# EAGLE board ButtonsLEDs (EAGLE 7.4.0)
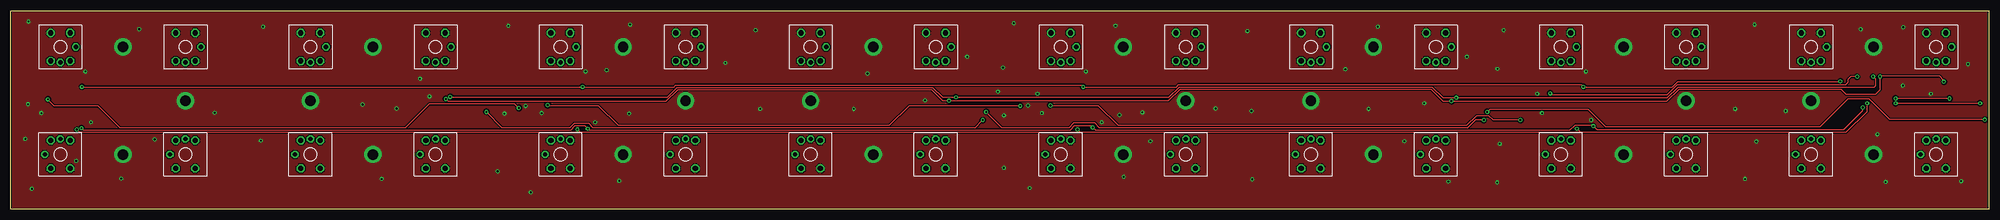
[diagram p0: board, top side]
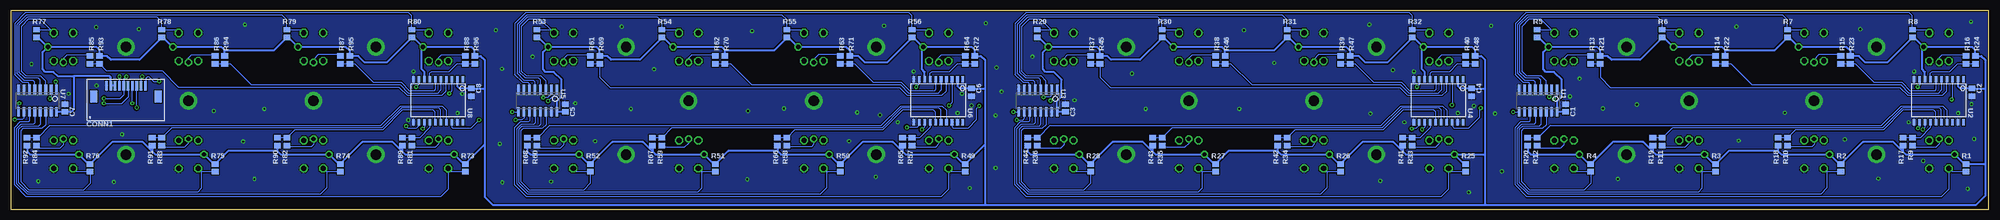
[diagram p1: board, bottom side, seen from below]

Size 458.7 x 46.1 mm. Coordinates in mm from the lower left corner, seen from the top.
Outline: 0,0 0,46.1 458.7,46.1 458.7,0 0,0
Copper layers (1*16): Top 0.035mm / dielectric 1.5mm / Bottom 0.035mm
Design rules "smiery": minimum track width 10mil, minimum drill 12mil, track to track 7mil, track to pad 5mil, pad to pad 5mil, via to via 6mil, smd to smd 0mil, copper to edge 12mil, drill to drill 10mil, minimum pad ring 13mil, minimum via ring 10mil, stop-mask expansion 2mil, vias tented up to drill 25mil, thermal gap 10mil

## Footprints (pad centres in the part's own frame; a part is rotated, then mirrored left to right if it is on the bottom)
C0805 = smd 1.27 x 1.524: 1 -0.9,0; 2 0.9,0
MOLEX-52271-1079 = smd 0.6 x 2.2: 1 -4.5,3.5; 2 -3.5,3.5; 3 -2.5,3.5; 4 -1.5,3.5; 5 -0.5,3.5; 6 0.5,3.5; 7 1.5,3.5; 8 2.5,3.5; 9 3.5,3.5; 10 4.5,3.5 | smd 1.65 x 2.8: S1 -7.5,1; S2 7.5,1
R0805 = smd 1.27 x 1.524: 1 -0.9,0; 2 0.9,0
OMRON-B3W-9 = drill 1.2 octagon: 1 -3.25,2.25; 2 3.25,2.25; 3 -3.25,-2.25; 4 3.25,-2.25 | drill 1 octagon: 6-A 0,3.6; 6-C 3.6,0
SO16 = smd 2.2 x 0.6: 1 -2.6,4.445; 2 -2.6,3.175; 3 -2.6,1.905; 4 -2.6,0.635; 5 -2.6,-0.635; 6 -2.6,-1.905; 7 -2.6,-3.175; 8 -2.6,-4.445; 9 2.6,-4.445; 10 2.6,-3.175; 11 2.6,-1.905; 12 2.6,-0.635; 13 2.6,0.635; 14 2.6,1.905; 15 2.6,3.175; 16 2.6,4.445
SOIC20 = smd 1.5 x 0.6: 1 -5,5.715; 2 -5,4.445; 3 -5,3.175; 4 -5,1.905; 5 -5,0.635; 6 -5,-0.635; 7 -5,-1.905; 8 -5,-3.175; 9 -5,-4.445; 10 -5,-5.715; 11 5,-5.715; 12 5,-4.445; 13 5,-3.175; 14 5,-1.905; 15 5,-0.635; 16 5,0.635; 17 5,1.905; 18 5,3.175; 19 5,4.445; 20 5,5.715

## Placement (x,y rotation side)
C1  100n  [C0805]  98.1,23.5 90 bottom
C2  100n  [C0805]  3.9,27.15 270 bottom
C3  100n  [C0805]  214.1,23.5 90 bottom
C4  100n  [C0805]  119.9,27.15 270 bottom
C5  100n  [C0805]  330.1,23.5 90 bottom
C6  100n  [C0805]  235.9,27.15 270 bottom
C7  100n  [C0805]  446.1,23.5 90 bottom
C8  100n  [C0805]  351.9,27.15 270 bottom
CONN1  PINHD-1X10-FFC-1MM-Z  [MOLEX-52271-1079]  432,25.2 0 bottom
R1  4k7  [R0805]  5.3,9.6 90 bottom
R2  4k7  [R0805]  34.3,9.6 90 bottom
R3  4k7  [R0805]  63.3,9.6 90 bottom
R4  4k7  [R0805]  92.3,9.6 90 bottom
R5  4k7  [R0805]  104.7,40.8 270 bottom
R6  4k7  [R0805]  75.7,40.8 270 bottom
R7  4k7  [R0805]  46.7,40.8 270 bottom
R8  4k7  [R0805]  17.7,40.8 270 bottom
R9  750  [R0805]  17.7,15.7 90 bottom
R10  750  [R0805]  46.7,15.7 90 bottom
R11  750  [R0805]  75.7,15.7 90 bottom
R12  750  [R0805]  104.7,15.7 90 bottom
R13  750  [R0805]  92.3,34.7 270 bottom
R14  750  [R0805]  63.3,34.7 270 bottom
R15  750  [R0805]  34.3,34.7 270 bottom
R16  750  [R0805]  5.3,34.7 270 bottom
R17  4k7  [R0805]  19.9,15.7 270 bottom
R18  4k7  [R0805]  48.9,15.7 270 bottom
R19  4k7  [R0805]  77.9,15.7 270 bottom
R20  4k7  [R0805]  106.9,15.7 270 bottom
R21  4k7  [R0805]  90.1,34.7 90 bottom
R22  4k7  [R0805]  61.1,34.7 90 bottom
R23  4k7  [R0805]  32.1,34.7 90 bottom
R24  4k7  [R0805]  3.1,34.7 90 bottom
R25  4k7  [R0805]  121.3,9.6 90 bottom
R26  4k7  [R0805]  150.3,9.6 90 bottom
R27  4k7  [R0805]  179.3,9.6 90 bottom
R28  4k7  [R0805]  208.3,9.6 90 bottom
R29  4k7  [R0805]  220.7,40.8 270 bottom
R30  4k7  [R0805]  191.7,40.8 270 bottom
R31  4k7  [R0805]  162.7,40.8 270 bottom
R32  4k7  [R0805]  133.7,40.8 270 bottom
R33  750  [R0805]  133.7,15.7 90 bottom
R34  750  [R0805]  162.7,15.7 90 bottom
R35  750  [R0805]  191.7,15.7 90 bottom
R36  750  [R0805]  220.7,15.7 90 bottom
R37  750  [R0805]  208.3,34.7 270 bottom
R38  750  [R0805]  179.3,34.7 270 bottom
R39  750  [R0805]  150.3,34.7 270 bottom
R40  750  [R0805]  121.3,34.7 270 bottom
R41  4k7  [R0805]  135.9,15.7 270 bottom
R42  4k7  [R0805]  164.9,15.7 270 bottom
R43  4k7  [R0805]  193.9,15.7 270 bottom
R44  4k7  [R0805]  222.9,15.7 270 bottom
R45  4k7  [R0805]  206.1,34.7 90 bottom
R46  4k7  [R0805]  177.1,34.7 90 bottom
R47  4k7  [R0805]  148.1,34.7 90 bottom
R48  4k7  [R0805]  119.1,34.7 90 bottom
R49  4k7  [R0805]  237.3,9.6 90 bottom
R50  4k7  [R0805]  266.3,9.6 90 bottom
R51  4k7  [R0805]  295.3,9.6 90 bottom
R52  4k7  [R0805]  324.3,9.6 90 bottom
R53  4k7  [R0805]  336.7,40.8 270 bottom
R54  4k7  [R0805]  307.7,40.8 270 bottom
R55  4k7  [R0805]  278.7,40.8 270 bottom
R56  4k7  [R0805]  249.7,40.8 270 bottom
R57  750  [R0805]  249.7,15.7 90 bottom
R58  750  [R0805]  278.7,15.7 90 bottom
R59  750  [R0805]  307.7,15.7 90 bottom
R60  750  [R0805]  336.7,15.7 90 bottom
R61  750  [R0805]  324.3,34.7 270 bottom
R62  750  [R0805]  295.3,34.7 270 bottom
R63  750  [R0805]  266.3,34.7 270 bottom
R64  750  [R0805]  237.3,34.7 270 bottom
R65  4k7  [R0805]  251.9,15.7 270 bottom
R66  4k7  [R0805]  280.9,15.7 270 bottom
R67  4k7  [R0805]  309.9,15.7 270 bottom
R68  4k7  [R0805]  338.9,15.7 270 bottom
R69  4k7  [R0805]  322.1,34.7 90 bottom
R70  4k7  [R0805]  293.1,34.7 90 bottom
R71  4k7  [R0805]  264.1,34.7 90 bottom
R72  4k7  [R0805]  235.1,34.7 90 bottom
R73  4k7  [R0805]  353.3,9.6 90 bottom
R74  4k7  [R0805]  382.3,9.6 90 bottom
R75  4k7  [R0805]  411.3,9.6 90 bottom
R76  4k7  [R0805]  440.3,9.6 90 bottom
R77  4k7  [R0805]  452.7,40.8 270 bottom
R78  4k7  [R0805]  423.7,40.8 270 bottom
R79  4k7  [R0805]  394.7,40.8 270 bottom
R80  4k7  [R0805]  365.7,40.8 270 bottom
R81  750  [R0805]  365.7,15.7 90 bottom
R82  750  [R0805]  394.7,15.7 90 bottom
R83  750  [R0805]  423.7,15.7 90 bottom
R84  750  [R0805]  452.7,15.7 90 bottom
R85  750  [R0805]  440.3,34.7 270 bottom
R86  750  [R0805]  411.3,34.7 270 bottom
R87  750  [R0805]  382.3,34.7 270 bottom
R88  750  [R0805]  353.3,34.7 270 bottom
R89  4k7  [R0805]  367.9,15.7 270 bottom
R90  4k7  [R0805]  396.9,15.7 270 bottom
R91  4k7  [R0805]  425.9,15.7 270 bottom
R92  4k7  [R0805]  454.9,15.7 270 bottom
R93  4k7  [R0805]  438.1,34.7 90 bottom
R94  4k7  [R0805]  409.1,34.7 90 bottom
R95  4k7  [R0805]  380.1,34.7 90 bottom
R96  4k7  [R0805]  351.1,34.7 90 bottom
SW1  OMRON-B3W-9  [OMRON-B3W-9]  11.5,12.7 90 top
SW2  OMRON-B3W-9  [OMRON-B3W-9]  40.5,12.7 90 top
SW3  OMRON-B3W-9  [OMRON-B3W-9]  69.5,12.7 90 top
SW4  OMRON-B3W-9  [OMRON-B3W-9]  98.5,12.7 90 top
SW5  OMRON-B3W-9  [OMRON-B3W-9]  98.5,37.7 270 top
SW6  OMRON-B3W-9  [OMRON-B3W-9]  69.5,37.7 270 top
SW7  OMRON-B3W-9  [OMRON-B3W-9]  40.5,37.7 270 top
SW8  OMRON-B3W-9  [OMRON-B3W-9]  11.5,37.7 270 top
SW9  OMRON-B3W-9  [OMRON-B3W-9]  127.5,12.7 90 top
SW10  OMRON-B3W-9  [OMRON-B3W-9]  156.5,12.7 90 top
SW11  OMRON-B3W-9  [OMRON-B3W-9]  185.5,12.7 90 top
SW12  OMRON-B3W-9  [OMRON-B3W-9]  214.5,12.7 90 top
SW13  OMRON-B3W-9  [OMRON-B3W-9]  214.5,37.7 270 top
SW14  OMRON-B3W-9  [OMRON-B3W-9]  185.5,37.7 270 top
SW15  OMRON-B3W-9  [OMRON-B3W-9]  156.5,37.7 270 top
SW16  OMRON-B3W-9  [OMRON-B3W-9]  127.5,37.7 270 top
SW17  OMRON-B3W-9  [OMRON-B3W-9]  243.5,12.7 90 top
SW18  OMRON-B3W-9  [OMRON-B3W-9]  272.5,12.7 90 top
SW19  OMRON-B3W-9  [OMRON-B3W-9]  301.5,12.7 90 top
SW20  OMRON-B3W-9  [OMRON-B3W-9]  330.5,12.7 90 top
SW21  OMRON-B3W-9  [OMRON-B3W-9]  330.5,37.7 270 top
SW22  OMRON-B3W-9  [OMRON-B3W-9]  301.5,37.7 270 top
SW23  OMRON-B3W-9  [OMRON-B3W-9]  272.5,37.7 270 top
SW24  OMRON-B3W-9  [OMRON-B3W-9]  243.5,37.7 270 top
SW25  OMRON-B3W-9  [OMRON-B3W-9]  359.5,12.7 90 top
SW26  OMRON-B3W-9  [OMRON-B3W-9]  388.5,12.7 90 top
SW27  OMRON-B3W-9  [OMRON-B3W-9]  417.5,12.7 90 top
SW28  OMRON-B3W-9  [OMRON-B3W-9]  446.5,12.7 90 top
SW29  OMRON-B3W-9  [OMRON-B3W-9]  446.5,37.7 270 top
SW30  OMRON-B3W-9  [OMRON-B3W-9]  417.5,37.7 270 top
SW31  OMRON-B3W-9  [OMRON-B3W-9]  388.5,37.7 270 top
SW32  OMRON-B3W-9  [OMRON-B3W-9]  359.5,37.7 270 top
U1  74HC165  [SO16]  104.5,25.2 270 bottom
U2  TPIC6B595  [SOIC20]  11.6,25.2 270 bottom
U3  74HC165  [SO16]  220.5,25.2 270 bottom
U4  TPIC6B595  [SOIC20]  127.6,25.2 270 bottom
U5  74HC165  [SO16]  336.5,25.2 270 bottom
U6  TPIC6B595  [SOIC20]  243.6,25.2 270 bottom
U7  74HC165  [SO16]  452.5,25.2 270 bottom
U8  TPIC6B595  [SOIC20]  359.6,25.2 270 bottom

## Library data of the parts
C1-C8 R1-R96 SW1-SW32 U2 U4 U6 U8 = igor_lbr
CONN1 = igor_lbr; MANUFACTURER: Molex; MPN: 52271-1079
U1 U3 U5 U7 = igor_lbr; MANUFACTURER: Nexperia; MPN: 74HC165D

## Nets
+3V3: C1.1 C2.1 C3.1 C4.1 C5.1 C6.1 C7.1 C8.1 CONN1.2 CONN1.3 R1.2 R2.2 R3.2 R4.2 R5.2 R6.2 R7.2 R8.2 R17.2 R18.2 R19.2 R20.2 R21.2 R22.2 R23.2 R24.2 R25.2 R26.2 R27.2 R28.2 R29.2 R30.2 R31.2 R32.2 R41.2 R42.2 R43.2 R44.2 R45.2 R46.2 R47.2 R48.2 R49.2 R50.2 R51.2 R52.2 R53.2 R54.2 R55.2 R56.2 R65.2 R66.2 R67.2 R68.2 R69.2 R70.2 R71.2 R72.2 R73.2 R74.2 R75.2 R76.2 R77.2 R78.2 R79.2 R80.2 R89.2 R90.2 R91.2 R92.2 R93.2 R94.2 R95.2 R96.2 SW1.6-A SW2.6-A SW3.6-A SW4.6-A SW5.6-A SW6.6-A SW7.6-A SW8.6-A SW9.6-A SW10.6-A SW11.6-A SW12.6-A SW13.6-A SW14.6-A SW15.6-A SW16.6-A SW17.6-A SW18.6-A SW19.6-A SW20.6-A SW21.6-A SW22.6-A SW23.6-A SW24.6-A SW25.6-A SW26.6-A SW27.6-A SW28.6-A SW29.6-A SW30.6-A SW31.6-A SW32.6-A U1.16 U2.2 U2.8 U3.16 U4.2 U4.8 U5.16 U6.2 U6.8 U7.16 U8.2 U8.8
BUTTON1: R1.1 SW1.1 U1.11
BUTTON2: R2.1 SW2.1 U1.12
BUTTON3: R3.1 SW3.1 U1.13
BUTTON4: R4.1 SW4.1 U1.14
BUTTON5: R5.1 SW5.1 U1.3
BUTTON6: R6.1 SW6.1 U1.4
BUTTON7: R7.1 SW7.1 U1.5
BUTTON8: R8.1 SW8.1 U1.6
BUTTON9: R25.1 SW9.1 U3.11
BUTTON10: R26.1 SW10.1 U3.12
BUTTON11: R27.1 SW11.1 U3.13
BUTTON12: R28.1 SW12.1 U3.14
BUTTON13: R29.1 SW13.1 U3.3
BUTTON14: R30.1 SW14.1 U3.4
BUTTON15: R31.1 SW15.1 U3.5
BUTTON16: R32.1 SW16.1 U3.6
BUTTON17: R49.1 SW17.1 U5.11
BUTTON18: R50.1 SW18.1 U5.12
BUTTON19: R51.1 SW19.1 U5.13
BUTTON20: R52.1 SW20.1 U5.14
BUTTON21: R53.1 SW21.1 U5.3
BUTTON22: R54.1 SW22.1 U5.4
BUTTON23: R55.1 SW23.1 U5.5
BUTTON24: R56.1 SW24.1 U5.6
BUTTON25: R73.1 SW25.1 U7.11
BUTTON26: R74.1 SW26.1 U7.12
BUTTON27: R75.1 SW27.1 U7.13
BUTTON28: R76.1 SW28.1 U7.14
BUTTON29: R77.1 SW29.1 U7.3
BUTTON30: R78.1 SW30.1 U7.4
BUTTON31: R79.1 SW31.1 U7.5
BUTTON32: R80.1 SW32.1 U7.6
GND: C1.2 C2.2 C3.2 C4.2 C5.2 C6.2 C7.2 C8.2 CONN1.1 SW1.3 SW2.3 SW3.3 SW4.3 SW5.3 SW6.3 SW7.3 SW8.3 SW9.3 SW10.3 SW11.3 SW12.3 SW13.3 SW14.3 SW15.3 SW16.3 SW17.3 SW18.3 SW19.3 SW20.3 SW21.3 SW22.3 SW23.3 SW24.3 SW25.3 SW26.3 SW27.3 SW28.3 SW29.3 SW30.3 SW31.3 SW32.3 U1.8 U1.15 U2.10 U2.11 U2.19 U3.8 U3.15 U4.10 U4.11 U4.19 U5.8 U5.15 U6.10 U6.11 U6.19 U7.8 U7.15 U8.10 U8.11 U8.19
LED1: R9.2 R17.1 U2.14
LED1_R: R9.1 SW1.6-C
LED2: R10.2 R18.1 U2.15
LED2_R: R10.1 SW2.6-C
LED3: R11.2 R19.1 U2.16
LED3_R: R11.1 SW3.6-C
LED4: R12.2 R20.1 U2.17
LED4_R: R12.1 SW4.6-C
LED5: R13.2 R21.1 U2.4
LED5_R: R13.1 SW5.6-C
LED6: R14.2 R22.1 U2.5
LED6_R: R14.1 SW6.6-C
LED7: R15.2 R23.1 U2.6
LED7_R: R15.1 SW7.6-C
LED8: R16.2 R24.1 U2.7
LED8_R: R16.1 SW8.6-C
LED9: R33.2 R41.1 U4.14
LED9_R: R33.1 SW9.6-C
LED10: R34.2 R42.1 U4.15
LED10_R: R34.1 SW10.6-C
LED11: R35.2 R43.1 U4.16
LED11_R: R35.1 SW11.6-C
LED12: R36.2 R44.1 U4.17
LED12_R: R36.1 SW12.6-C
LED13: R37.2 R45.1 U4.4
LED13_R: R37.1 SW13.6-C
LED14: R38.2 R46.1 U4.5
LED14_R: R38.1 SW14.6-C
LED15: R39.2 R47.1 U4.6
LED15_R: R39.1 SW15.6-C
LED16: R40.2 R48.1 U4.7
LED16_R: R40.1 SW16.6-C
LED17: R57.2 R65.1 U6.14
LED17_R: R57.1 SW17.6-C
LED18: R58.2 R66.1 U6.15
LED18_R: R58.1 SW18.6-C
LED19: R59.2 R67.1 U6.16
LED19_R: R59.1 SW19.6-C
LED20: R60.2 R68.1 U6.17
LED20_R: R60.1 SW20.6-C
LED21: R61.2 R69.1 U6.4
LED21_R: R61.1 SW21.6-C
LED22: R62.2 R70.1 U6.5
LED22_R: R62.1 SW22.6-C
LED23: R63.2 R71.1 U6.6
LED23_R: R63.1 SW23.6-C
LED24: R64.2 R72.1 U6.7
LED24_R: R64.1 SW24.6-C
LED25: R81.2 R89.1 U8.14
LED25_R: R81.1 SW25.6-C
LED26: R82.2 R90.1 U8.15
LED26_R: R82.1 SW26.6-C
LED27: R83.2 R91.1 U8.16
LED27_R: R83.1 SW27.6-C
LED28: R84.2 R92.1 U8.17
LED28_R: R84.1 SW28.6-C
LED29: R85.2 R93.1 U8.4
LED29_R: R85.1 SW29.6-C
LED30: R86.2 R94.1 U8.5
LED30_R: R86.1 SW30.6-C
LED31: R87.2 R95.1 U8.6
LED31_R: R87.1 SW31.6-C
LED32: R88.2 R96.1 U8.7
LED32_R: R88.1 SW32.6-C
SR_IN_CLOCK: CONN1.5 U1.2 U3.2 U5.2 U7.2
SR_IN_DAISY_OUT_1: U5.9 U7.10
SR_IN_DAISY_OUT_2: U3.9 U5.10
SR_IN_DAISY_OUT_3: U1.9 U3.10
SR_IN_DATA: CONN1.6 U7.9
SR_IN_LATCH: CONN1.4 U1.1 U3.1 U5.1 U7.1
SR_OUT_CLOCK: CONN1.7 U2.13 U4.13 U6.13 U8.13
SR_OUT_DAISY_OUT_1: U6.3 U8.18
SR_OUT_DAISY_OUT_2: U4.3 U6.18
SR_OUT_DAISY_OUT_3: U2.3 U4.18
SR_OUT_DATA: CONN1.9 U8.3
SR_OUT_LATCH: CONN1.8 U2.12 U4.12 U6.12 U8.12
SR_OUT_OE: CONN1.10 U2.9 U4.9 U6.9 U8.9

## Tracks (layer width: path | path; a pad name or v marks a point on that pad's centre or on a via)
+3V3
  Bottom 0.406: R17.2 19.9,13.4 | 19.9,13.4 19.2,12.7 SW1.6-A 5.7,10.5 R1.2 0.8,10.5 | R18.2 48.9,13.5 | 48.9,13.5 48.1,12.7 SW2.6-A 34.7,10.5 R2.2 29.2,15.6 22.1,15.6 19.9,13.4 | R19.2 77.9,13.4 | 77.9,13.4 77.2,12.7 SW3.6-A 63.7,10.5 R3.2 60.3,13.5 48.9,13.5 | R20.2 106.9,13.4 106.2,12.7 SW4.6-A 92.7,10.5 R4.2 87.2,15.6 80.1,15.6 77.9,13.4 | SW8.6-A 3.8,37.7 3.1,37 R24.2 1.7,35.6 0.8,34.7 0.8,28 | R22.2 61.1,37 | 61.1,37 61.8,37.7 SW6.6-A 75.3,39.9 R6.2 75.7,39.6 75.9,39.6 80.8,34.7 87.5,34.7 88.4,35.6 R21.2 90.1,37 90.8,37.7 SW5.6-A | R5.2 104.3,39.9 SW5.6-A | SW8.6-A 17.3,39.9 R8.2 23.5,34.1 28.6,34.1 30.1,35.6 R23.2 32.1,36.8 33,37.7 SW7.6-A 46.3,39.9 R7.2 49.6,37 61.1,37 | 0.8,28 0.8,10.5 | 0.8,10.5 0.8,3.1 3,0.9 116.8,0.9 | C1.1 U1.16 100.06,25.14 99,26.2 99,30.1 100.8,31.9 102.7,31.9 103.3,32.5 103.3,36.5 SW5.6-A | U2.2 7.16,28.66 6.55,28.05 C2.1 0.85,28.05 0.8,28 | U2.8 14.78,31.88 15.4,32.5 15.4,37.4 SW8.6-A | R41.2 135.9,13.4 | 135.9,13.4 135.2,12.7 SW9.6-A | R42.2 164.9,13.5 | 164.9,13.5 164.1,12.7 SW10.6-A 150.7,10.5 R26.2 145.2,15.6 138.1,15.6 135.9,13.4 | R43.2 193.9,13.4 | 193.9,13.4 193.2,12.7 SW11.6-A 179.7,10.5 R27.2 176.3,13.5 164.9,13.5 | R44.2 222.9,13.4 222.2,12.7 SW12.6-A 208.7,10.5 R28.2 203.2,15.6 196.1,15.6 193.9,13.4 | SW16.6-A 119.8,37.7 119.1,37 R48.2 117.7,35.6 116.8,34.7 116.8,28.1 | R46.2 177.1,37 | 177.1,37 177.8,37.7 SW14.6-A 191.3,39.9 R30.2 191.7,39.6 191.9,39.6 196.8,34.7 203.5,34.7 204.4,35.6 R45.2 206.1,37 206.8,37.7 SW13.6-A | R29.2 220.3,39.9 SW13.6-A | SW16.6-A 133.3,39.9 R32.2 139.5,34.1 144.6,34.1 146.1,35.6 R47.2 148.1,36.8 149,37.7 SW15.6-A 162.3,39.9 R31.2 165.6,37 177.1,37
  Bottom 0.406: R25.2 121.7,10.5 SW9.6-A | 116.8,28.1 116.8,12.7 | 116.8,12.7 116.8,0.9 | C3.1 U3.16 216.06,25.14 215,26.2 215,30.1 216.8,31.9 218.7,31.9 219.3,32.5 219.3,36.5 SW13.6-A | U4.2 123.16,28.66 122.55,28.05 C4.1 116.85,28.05 116.8,28.1 | U4.8 130.78,31.88 131.4,32.5 131.4,37.4 SW16.6-A | R65.2 251.9,13.4 | 251.9,13.4 251.2,12.7 SW17.6-A 237.7,10.5 R49.2 232.8,15 | R66.2 280.9,13.5 | 280.9,13.5 280.1,12.7 SW18.6-A 266.7,10.5 R50.2 261.2,15.6 254.1,15.6 251.9,13.4 | R67.2 309.9,13.4 | 309.9,13.4 309.2,12.7 SW19.6-A 295.7,10.5 R51.2 292.3,13.5 280.9,13.5 | R68.2 338.9,13.4 338.2,12.7 SW20.6-A 324.7,10.5 R52.2 319.2,15.6 312.1,15.6 309.9,13.4 | SW24.6-A 235.8,37.7 235.1,37 R72.2 233.7,35.6 232.8,34.7 232.8,28.1 | R70.2 293.1,37 | 293.1,37 293.8,37.7 SW22.6-A 307.3,39.9 R54.2 307.7,39.6 307.9,39.6 312.8,34.7 319.5,34.7 320.4,35.6 R69.2 322.1,37 322.8,37.7 SW21.6-A | R53.2 336.3,39.9 SW21.6-A | SW24.6-A 249.3,39.9 R56.2 255.5,34.1 260.6,34.1 262.1,35.6 R71.2 264.1,36.8 265,37.7 SW23.6-A 278.3,39.9 R55.2 281.6,37 293.1,37 | 232.8,28.1 232.8,15 | C5.1 U5.16 332.06,25.14 331,26.2 331,30.1 332.8,31.9 334.7,31.9 335.3,32.5 335.3,36.5 SW21.6-A | U6.2 239.16,28.66 238.55,28.05 C6.1 232.85,28.05 232.8,28.1 | U6.8 246.78,31.88 247.4,32.5 247.4,37.4 SW24.6-A | R89.2 367.9,13.4 | 367.9,13.4 367.2,12.7 SW25.6-A 353.7,10.5 R73.2 348.8,15 | R90.2 396.9,13.5 | 396.9,13.5 396.1,12.7 SW26.6-A 382.7,10.5 R74.2 377.2,15.6 370.1,15.6 367.9,13.4 | R91.2 425.9,13.4 | 425.9,13.4 425.2,12.7 SW27.6-A 411.7,10.5 R75.2 408.3,13.5 396.9,13.5 | R92.2 454.9,13.4 454.2,12.7 SW28.6-A 440.7,10.5 R76.2 435.2,15.6 428.1,15.6 425.9,13.4
  Bottom 0.406: SW32.6-A 351.8,37.7 351.1,37 R96.2 349.7,35.6 348.8,34.7 348.8,28.1 | R94.2 409.1,37 | 409.1,37 409.8,37.7 SW30.6-A 423.3,39.9 R78.2 423.7,39.6 423.9,39.6 428.8,34.7 435.5,34.7 436.4,35.6 R93.2 438.1,37 438.8,37.7 SW29.6-A | R77.2 452.3,39.9 SW29.6-A | SW32.6-A 365.3,39.9 R80.2 371.5,34.1 376.6,34.1 378.1,35.6 R95.2 380.1,36.8 381,37.7 SW31.6-A 394.3,39.9 R79.2 397.6,37 409.1,37 | 348.8,28.1 348.8,15 | U7.16 C7.1 444.7,22.6 444.1,23.2 444.1,30.9 | SW29.6-A 451.3,36.5 451.3,32.5 450.7,31.9 448.8,31.9 447.8,30.9 444.5,30.9 444.1,30.9 | U8.2 355.15,28.66 354.55,28.05 C8.1 348.85,28.05 348.8,28.1 | U8.8 362.77,31.88 363.4,32.5 363.4,37.4 SW32.6-A | 116.8,0.9 232.8,0.9 | 232.8,0.9 346.8,0.9 348.8,2.9 348.8,15 | 232.8,15 232.8,0.9 | SW9.6-A 116.8,12.7 | CONN1.3 CONN1.2 435.5,30.6 435.8,30.9 444.1,30.9
BUTTON1
  Bottom 0.254: R1.1 8.5,8.7 SW1.1 9.25,4.65 11,2.9 107.1,2.9 109.8,5.6 109.8,19 108.6,20.2 106.7,20.2 106.41,20.5 U1.11
BUTTON2
  Bottom 0.254: R2.1 37.5,8.7 | 37.5,8.7 SW2.1 | 37.5,8.7 37.5,4.9 39,3.4 106.8,3.4 109.3,5.9 109.3,18.8 108.4,19.7 105.5,19.7 105.14,20.07 U1.12
BUTTON3
  Bottom 0.254: R3.1 66.5,8.7 | 66.5,8.7 SW3.1 | 66.5,8.7 66.5,4.8 67.4,3.9 106.6,3.9 108.8,6.1 108.8,18.6 108.2,19.2 104.3,19.2 103.86,19.64 U1.13
BUTTON4
  Bottom 0.254: SW4.1 95.5,8.7 R4.1 92.3,6 93.9,4.4 106.4,4.4 108.3,6.3 108.3,18.3 107.9,18.7 103.5,18.7 102.59,19.61 U1.14
BUTTON5
  Bottom 0.254: R5.1 101.5,41.7 SW5.1 103.9,44.1 106.6,44.1 108.3,42.4 108.3,32.1 107.1,30.9 103.7,30.9 102.59,29.8 U1.3
BUTTON6
  Bottom 0.254: SW6.1 72.5,41.7 R6.1 75.7,43.6 76.7,44.6 106.9,44.6 108.8,42.7 108.8,31.9 107.3,30.4 104.3,30.4 103.86,29.96 U1.4
BUTTON7
  Bottom 0.254: SW7.1 43.5,41.7 R7.1 46.7,44 47.8,45.1 107.1,45.1 109.3,42.9 109.3,31.6 107.6,29.9 105.5,29.9 105.14,29.54 U1.5
BUTTON8
  Bottom 0.254: SW8.1 14.5,41.7 R8.1 17.7,44.9 18.4,45.6 107.3,45.6 109.8,43.1 109.8,31.3 107.9,29.4 106.7,29.4 106.41,29.11 U1.6
BUTTON9
  Bottom 0.254: R25.1 124.5,8.7 SW9.1 125.25,4.65 127,2.9 223.1,2.9 225.8,5.6 225.8,19 224.6,20.2 222.7,20.2 222.41,20.5 U3.11
BUTTON10
  Bottom 0.254: R26.1 153.5,8.7 | 153.5,8.7 SW10.1 | 153.5,8.7 153.5,4.9 155,3.4 222.8,3.4 225.3,5.9 225.3,18.8 224.4,19.7 221.5,19.7 221.13,20.07 U3.12
BUTTON11
  Bottom 0.254: R27.1 182.5,8.7 | 182.5,8.7 SW11.1 | 182.5,8.7 182.5,4.8 183.4,3.9 222.6,3.9 224.8,6.1 224.8,18.6 224.2,19.2 220.3,19.2 219.87,19.64 U3.13
BUTTON12
  Bottom 0.254: SW12.1 211.5,8.7 R28.1 208.3,6 209.9,4.4 222.4,4.4 224.3,6.3 224.3,18.3 223.9,18.7 219.5,18.7 218.59,19.61 U3.14
BUTTON13
  Bottom 0.254: R29.1 217.5,41.7 SW13.1 219.9,44.1 222.6,44.1 224.3,42.4 224.3,32.1 223.1,30.9 219.7,30.9 218.59,29.8 U3.3
BUTTON14
  Bottom 0.254: SW14.1 188.5,41.7 R30.1 191.7,43.6 192.7,44.6 222.9,44.6 224.8,42.7 224.8,31.9 223.3,30.4 220.3,30.4 219.87,29.96 U3.4
BUTTON15
  Bottom 0.254: SW15.1 159.5,41.7 R31.1 162.7,44 163.8,45.1 223.1,45.1 225.3,42.9 225.3,31.6 223.6,29.9 221.5,29.9 221.13,29.54 U3.5
BUTTON16
  Bottom 0.254: SW16.1 130.5,41.7 R32.1 133.7,44.9 134.4,45.6 223.3,45.6 225.8,43.1 225.8,31.3 223.9,29.4 222.7,29.4 222.41,29.11 U3.6
BUTTON17
  Bottom 0.254: R49.1 240.5,8.7 SW17.1 241.25,4.65 243,2.9 339.1,2.9 341.8,5.6 341.8,19 340.6,20.2 338.7,20.2 338.4,20.5 U5.11
BUTTON18
  Bottom 0.254: R50.1 269.5,8.7 | 269.5,8.7 SW18.1 | 269.5,8.7 269.5,4.9 271,3.4 338.8,3.4 341.3,5.9 341.3,18.8 340.4,19.7 337.5,19.7 337.13,20.07 U5.12
BUTTON19
  Bottom 0.254: R51.1 298.5,8.7 | 298.5,8.7 SW19.1 | 298.5,8.7 298.5,4.8 299.4,3.9 338.6,3.9 340.8,6.1 340.8,18.6 340.2,19.2 336.3,19.2 335.87,19.64 U5.13
BUTTON20
  Bottom 0.254: SW20.1 327.5,8.7 R52.1 324.3,6 325.9,4.4 338.4,4.4 340.3,6.3 340.3,18.3 339.9,18.7 335.5,18.7 334.6,19.61 U5.14
BUTTON21
  Bottom 0.254: R53.1 333.5,41.7 SW21.1 335.9,44.1 338.6,44.1 340.3,42.4 340.3,32.1 339.1,30.9 335.7,30.9 334.6,29.8 U5.3
BUTTON22
  Bottom 0.254: SW22.1 304.5,41.7 R54.1 307.7,43.6 308.7,44.6 338.9,44.6 340.8,42.7 340.8,31.9 339.3,30.4 336.3,30.4 335.87,29.96 U5.4
BUTTON23
  Bottom 0.254: SW23.1 275.5,41.7 R55.1 278.7,44 279.8,45.1 339.1,45.1 341.3,42.9 341.3,31.6 339.6,29.9 337.5,29.9 337.13,29.54 U5.5
BUTTON24
  Bottom 0.254: SW24.1 246.5,41.7 R56.1 249.7,44.9 250.4,45.6 339.3,45.6 341.8,43.1 341.8,31.3 339.9,29.4 338.7,29.4 338.4,29.11 U5.6
BUTTON25
  Bottom 0.254: R73.1 356.5,8.7 SW25.1 357.25,4.65 359,2.9 455.1,2.9 457.8,5.6 457.8,19 456.6,20.2 454.7,20.2 454.4,20.5 U7.11
BUTTON26
  Bottom 0.254: R74.1 385.5,8.7 | 385.5,8.7 SW26.1 | 385.5,8.7 385.5,4.9 387,3.4 454.8,3.4 457.3,5.9 457.3,18.8 456.4,19.7 453.5,19.7 453.13,20.07 U7.12
BUTTON27
  Bottom 0.254: R75.1 414.5,8.7 | 414.5,8.7 SW27.1 | 414.5,8.7 414.5,4.8 415.4,3.9 454.6,3.9 456.8,6.1 456.8,18.6 456.2,19.2 452.3,19.2 451.87,19.64 U7.13
BUTTON28
  Bottom 0.254: SW28.1 443.5,8.7 R76.1 440.3,6 441.9,4.4 454.4,4.4 456.3,6.3 456.3,18.3 455.9,18.7 451.5,18.7 450.6,19.61 U7.14
BUTTON29
  Bottom 0.254: R77.1 449.5,41.7 SW29.1 451.9,44.1 454.6,44.1 456.3,42.4 456.3,32.1 455.1,30.9 451.7,30.9 450.6,29.8 U7.3
BUTTON30
  Bottom 0.254: SW30.1 420.5,41.7 R78.1 423.7,43.6 424.7,44.6 454.9,44.6 456.8,42.7 456.8,31.9 455.3,30.4 452.3,30.4 451.87,29.96 U7.4
BUTTON31
  Bottom 0.254: SW31.1 391.5,41.7 R79.1 394.7,44 395.8,45.1 455.1,45.1 457.3,42.9 457.3,31.6 455.6,29.9 453.5,29.9 453.13,29.54 U7.5
BUTTON32
  Bottom 0.254: SW32.1 362.5,41.7 R80.1 365.7,44.9 366.4,45.6 455.3,45.6 457.8,43.1 457.8,31.3 455.9,29.4 454.7,29.4 454.4,29.11 U7.6
GND  (via drill 0.4 pad 0.6, 2.4 pad 4)
  other vias: 17.3,32 18.6,20.2 7.1,22.3 26,37.7 40.5,25.2 69.5,25.2 84,37.7 84,12.7 26,12.7 365.3,32 366.5,20.7 355.1,22.3 374,37.7 388.5,25.2 417.5,25.2 432,37.7 432,12.7 374,12.7 249.3,32 253,20.2 239.1,22.3 258,37.7 272.5,25.2 301.5,25.2 316,37.7 316,12.7 258,12.7 133.3,32 135.5,20.2 123.1,22.3 142,37.7 156.5,25.2 185.5,25.2 200,37.7 200,12.7 142,12.7 257.1,21.9 264.3,15.8 258.1,7.5 236.3,4.9 230.3,9.6 230.1,32.9 256.2,42.6 232.6,43.2 143.4,22.2 115.4,42.6 81.6,24.3 58.5,42.4 29.8,41.8 25.6,7.1 47.3,22.4 173.8,23.3 141.1,6.6 120.6,3.9 112.9,8.8 228.9,27.3 230.3,21.8 262.4,22.5 287.7,22.8 314.9,23.3 309.5,32.5 286.8,41.4 317,42.4 337.7,35.4 346.2,41.6 344.8,32.6 345.3,15.2 344.7,6.2 333.4,6.4 323.2,15.8 287.9,6.9 279.4,23.4 399.9,23.3 411.6,22.8 402.2,7 404.8,15.7 432.9,17.4 434.8,6.3 452.3,6.5 453.9,33.7 438.9,42.3 429,41.8 404.4,42.9 4.1,43.6 3.4,16.3 4.9,4.7 15.2,11.2 33.4,16.2 58,15.9 86,7 89.5,23.4 94.9,30.3 114.5,22.2 138.2,32.3 143.6,42.9 172.7,41.6 165.7,34 198.7,31.5 195.5,23.3 221.8,35.4 235.9,24.1 212,25.3 119.4,24 97.1,26.2 4,24.4 238.1,26.8 327.8,24.6 354,26.8 438.8,28.7 445.3,26.8
  pour Bottom (isolate 0.305): 0,0 458.7,0 458.7,46.1 0,46.1
  pour Top (isolate 0.305): 0,46.1 458.7,46.1 458.7,0 0,0
LED1
  Bottom 0.254: R17.1 R9.2 15.9,16.6 13.51,19 U2.14
LED1_R
  Bottom 0.254: SW1.6-C 11.5,15.2 12.3,14.4 17.3,14.4 R9.1
LED2
  Bottom 0.254: R18.1 R10.2 44.9,18.4 24.5,18.4 19.9,23 12.7,23 12.23,22.54 U2.15
LED2_R
  Bottom 0.254: SW2.6-C 40.5,15 41,14.5 46.4,14.5 R10.1
LED3
  Bottom 0.254: R19.1 R11.2 73.4,18.9 24.7,18.9 20.1,23.5 11.4,23.5 10.96,23.07 U2.16
LED3_R
  Bottom 0.254: SW3.6-C 69.5,15.3 70.5,14.3 75.2,14.3 R11.1
LED4
  Bottom 0.254: R20.1 R12.2 104.5,16.6 101.7,19.4 24.9,19.4 20.3,24 10.7,24 9.7,23 U2.17
LED4_R
  Bottom 0.254: SW4.6-C 98.5,14.9 99.3,14.1 104,14.1 R12.1
LED5
  Bottom 0.254: R13.2 R21.1 90.1,30.7 87.7,28.3 20.6,28.3 18.8,26.5 10.7,26.5 9.7,27.5 U2.4
LED5_R
  Bottom 0.254: SW5.6-C 98.5,35 97.6,35.9 92.6,35.9 R13.1
LED6
  Bottom 0.254: R22.1 R14.2 59.8,33.8 54.9,28.9 20.4,28.9 18.5,27 11.6,27 10.96,27.64 U2.5
LED6_R
  Bottom 0.254: SW6.6-C 69.5,35.1 68.7,35.9 63.6,35.9 R14.1
LED7
  Bottom 0.254: R23.1 R15.2 31,33.8 26.7,29.5 20.2,29.5 18.2,27.5 12.5,27.5 12.23,27.77 U2.6
LED7_R
  Bottom 0.254: SW7.6-C 40.5,34.8 39.3,36 34.7,36 R15.1
LED8
  Bottom 0.254: R24.1 R16.2 7.2,33.8 9,32 13.1,32 13.51,31.59 U2.7
LED8_R
  Bottom 0.254: SW8.6-C 11.5,35.2 10.8,35.9 5.6,35.9 R16.1
LED9
  Bottom 0.254: R41.1 R33.2 131.9,16.6 129.5,19 U4.14
LED9_R
  Bottom 0.254: SW9.6-C 127.5,15.2 128.3,14.4 133.3,14.4 R33.1
LED10
  Bottom 0.254: R42.1 R34.2 160.9,18.4 140.5,18.4 135.9,23 128.7,23 128.24,22.54 U4.15
LED10_R
  Bottom 0.254: SW10.6-C 156.5,15 157,14.5 162.4,14.5 R34.1
LED11
  Bottom 0.254: R43.1 R35.2 189.4,18.9 140.7,18.9 136.1,23.5 127.4,23.5 126.97,23.07 U4.16
LED11_R
  Bottom 0.254: SW11.6-C 185.5,15.3 186.5,14.3 191.2,14.3 R35.1
LED12
  Bottom 0.254: R44.1 R36.2 220.5,16.6 217.7,19.4 140.9,19.4 136.3,24 126.7,24 125.7,23 U4.17
LED12_R
  Bottom 0.254: SW12.6-C 214.5,14.9 215.3,14.1 220,14.1 R36.1
LED13
  Bottom 0.254: R37.2 R45.1 206.1,30.7 203.7,28.3 136.6,28.3 134.8,26.5 126.7,26.5 125.7,27.5 U4.4
LED13_R
  Bottom 0.254: SW13.6-C 214.5,35 213.6,35.9 208.6,35.9 R37.1
LED14
  Bottom 0.254: R46.1 R38.2 175.8,33.8 170.9,28.9 136.4,28.9 134.5,27 127.6,27 126.97,27.64 U4.5
LED14_R
  Bottom 0.254: SW14.6-C 185.5,35.1 184.7,35.9 179.6,35.9 R38.1
LED15
  Bottom 0.254: R47.1 R39.2 147,33.8 142.7,29.5 136.2,29.5 134.2,27.5 128.5,27.5 128.24,27.77 U4.6
LED15_R
  Bottom 0.254: SW15.6-C 156.5,34.8 155.3,36 150.7,36 R39.1
LED16
  Bottom 0.254: R48.1 R40.2 123.2,33.8 125,32 129.1,32 129.5,31.59 U4.7
LED16_R
  Bottom 0.254: SW16.6-C 127.5,35.2 126.8,35.9 121.6,35.9 R40.1
LED17
  Bottom 0.254: R65.1 R57.2 247.9,16.6 245.5,19 U6.14
LED17_R
  Bottom 0.254: SW17.6-C 243.5,15.2 244.3,14.4 249.3,14.4 R57.1
LED18
  Bottom 0.254: R66.1 R58.2 276.9,18.4 256.5,18.4 251.9,23 244.7,23 244.24,22.54 U6.15
LED18_R
  Bottom 0.254: SW18.6-C 272.5,15 273,14.5 278.4,14.5 R58.1
LED19
  Bottom 0.254: R67.1 R59.2 305.4,18.9 256.7,18.9 252.1,23.5 243.4,23.5 242.97,23.07 U6.16
LED19_R
  Bottom 0.254: SW19.6-C 301.5,15.3 302.5,14.3 307.2,14.3 R59.1
LED20
  Bottom 0.254: R68.1 R60.2 336.5,16.6 333.7,19.4 256.9,19.4 252.3,24 242.7,24 241.7,23 U6.17
LED20_R
  Bottom 0.254: SW20.6-C 330.5,14.9 331.3,14.1 336,14.1 R60.1
LED21
  Bottom 0.254: R61.2 R69.1 322.1,30.7 319.7,28.3 252.6,28.3 250.8,26.5 242.7,26.5 241.7,27.5 U6.4
LED21_R
  Bottom 0.254: SW21.6-C 330.5,35 329.6,35.9 324.6,35.9 R61.1
LED22
  Bottom 0.254: R70.1 R62.2 291.8,33.8 286.9,28.9 252.4,28.9 250.5,27 243.6,27 242.97,27.64 U6.5
LED22_R
  Bottom 0.254: SW22.6-C 301.5,35.1 300.7,35.9 295.6,35.9 R62.1
LED23
  Bottom 0.254: R71.1 R63.2 263,33.8 258.7,29.5 252.2,29.5 250.2,27.5 244.5,27.5 244.24,27.77 U6.6
LED23_R
  Bottom 0.254: SW23.6-C 272.5,34.8 271.3,36 266.7,36 R63.1
LED24
  Bottom 0.254: R72.1 R64.2 239.2,33.8 241,32 245.1,32 245.5,31.59 U6.7
LED24_R
  Bottom 0.254: SW24.6-C 243.5,35.2 242.8,35.9 237.6,35.9 R64.1
LED25
  Bottom 0.254: R89.1 R81.2 363.9,16.6 361.5,19 U8.14
LED25_R
  Bottom 0.254: SW25.6-C 359.5,15.2 360.3,14.4 365.3,14.4 R81.1
LED26
  Bottom 0.254: R90.1 R82.2 392.9,18.4 372.5,18.4 367.9,23 360.7,23 360.24,22.54 U8.15
LED26_R
  Bottom 0.254: SW26.6-C 388.5,15 389,14.5 394.4,14.5 R82.1
LED27
  Bottom 0.254: R91.1 R83.2 421.4,18.9 372.7,18.9 368.1,23.5 359.4,23.5 358.96,23.07 U8.16
LED27_R
  Bottom 0.254: SW27.6-C 417.5,15.3 418.5,14.3 423.2,14.3 R83.1
LED28
  Bottom 0.254: R92.1 R84.2 452.5,16.6 449.7,19.4 372.9,19.4 368.3,24 358.7,24 357.7,23 U8.17
LED28_R
  Bottom 0.254: SW28.6-C 446.5,14.9 447.3,14.1 452,14.1 R84.1
LED29
  Bottom 0.254: R85.2 R93.1 436.4,32.1 423.5,32.1 419.7,28.3 368.6,28.3 366.8,26.5 358.7,26.5 357.7,27.5 U8.4
LED29_R
  Bottom 0.254: SW29.6-C 446.5,35 445.6,35.9 440.6,35.9 R85.1
LED30
  Bottom 0.254: R94.1 R86.2 407.8,33.8 402.9,28.9 368.4,28.9 366.5,27 359.6,27 358.96,27.64 U8.5
LED30_R
  Bottom 0.254: SW30.6-C 417.5,35.1 416.7,35.9 411.6,35.9 R86.1
LED31
  Bottom 0.254: R95.1 R87.2 379,33.8 374.7,29.5 368.2,29.5 366.2,27.5 360.5,27.5 360.24,27.77 U8.6
LED31_R
  Bottom 0.254: SW31.6-C 388.5,34.8 387.3,36 382.7,36 R87.1
LED32
  Bottom 0.254: R96.1 R88.2 355.2,33.8 357,32 361.1,32 361.5,31.59 U8.7
LED32_R
  Bottom 0.254: SW32.6-C 359.5,35.2 358.8,35.9 353.6,35.9 R88.1
SR_IN_CLOCK  (via drill 0.4 pad 0.6)
  Top 0.254: v101.9,26.1 152.3,26.1 154.5,28.3 213.8,28.3 216.1,26 v219.2,26 268.6,26 271,28.4 329.6,28.4 332.1,25.9 v335.2,25.9 384.2,25.9 386.7,28.4 432.2,28.4 CONN1.5 432.5,30.2 v431.9,30.8 | v449.6,25.7 v437.1,25.7
  Bottom 0.254: U1.2 101.33,26.68 v101.9,26.1 | v437.1,25.7 433.3,25.7 432.5,26.5 CONN1.5 432.5,30.2 v431.9,30.8 | U3.2 217.32,26.38 217.7,26 v219.2,26 | U5.2 333.32,26.77 334.2,25.9 v335.2,25.9 | U7.2 449.32,25.98 v449.6,25.7
SR_IN_DAISY_OUT_1  (via drill 0.4 pad 0.6)
  Top 0.254: v457.8,20.8 435.8,20.8 431,25.6 426,25.6 419.5,19.1 369.9,19.1 365.8,23.2 343,23.2 v342.4,22.6
  Bottom 0.254: U7.10 455.68,21.12 456,20.8 v457.8,20.8 | v342.4,22.6 U5.9
SR_IN_DAISY_OUT_2  (via drill 0.4 pad 0.6)
  Top 0.254: v226.2,22.6 229.9,18.9 245.4,18.9 246.5,20 251.4,20 252.5,18.9 337.85,18.9 339.65,20.7 v341.6,20.7
  Bottom 0.254: v226.2,22.6 U3.9 | U5.10 339.68,21.23 340.2,20.7 v341.6,20.7
SR_IN_DAISY_OUT_3  (via drill 0.4 pad 0.6)
  Top 0.254: v110.3,22.6 114,18.9 129.6,18.9 130.6,19.9 134.1,19.9 135.1,18.9 223.6,18.9 v225.4,20.7
  Bottom 0.254: v110.3,22.6 U1.9 | v225.4,20.7 224,20.7 223.68,21.02 U3.10
SR_IN_DATA  (via drill 0.4 pad 0.6)
  Top 0.254: v456.7,24.6 v437.1,24.6
  Bottom 0.254: U7.9 456.94,24.36 v456.7,24.6 | v437.1,24.6 433,24.6 431.5,26.1 CONN1.6
SR_IN_LATCH  (via drill 0.4 pad 0.6)
  Top 0.254: v100.9,25.6 101.4,25.1 152,25.1 154.7,27.8 213.5,27.8 216.1,25.2 v217.6,25.2 268.5,25.2 271.2,27.9 329.3,27.9 332.1,25.1 v334.1,25.1 384.1,25.1 386.9,27.9 424.4,27.9 425.5,26.8 432.5,26.8 433.5,27.8 v433.5,30.8 433.6,30.9 447.3,30.9 448.3,29.9 v448.3,29.6
  Bottom 0.254: U1.1 100.06,26.45 v100.9,25.6 | U3.1 216.06,26.75 v217.6,25.2 | U5.1 332.06,27.14 v334.1,25.1 | U7.1 448.06,29.36 v448.3,29.6 | v433.5,30.8 CONN1.4
SR_OUT_CLOCK  (via drill 0.4 pad 0.6)
  Top 0.254: v15.3,18.5 15.9,17.9 132,17.9 | v131.4,18.5 132,17.9 | 132,17.9 248,17.9 | v247.4,18.5 248,17.9 | 248,17.9 364,17.9 | v363.2,18.7 364,17.9 | 364,17.9 425.7,17.9 430.5,22.7 v430.5,24.6
  Bottom 0.254: U2.13 14.78,19.02 v15.3,18.5 | U4.13 130.78,19.12 v131.4,18.5 | U6.13 246.78,19.12 v247.4,18.5 | U8.13 362.77,19.12 v363.2,18.7 | v430.5,24.6 CONN1.7
SR_OUT_DAISY_OUT_1  (via drill 0.4 pad 0.6)
  Top 0.254: v350.1,20.7 343.8,20.7 342.8,21.7 339.9,21.7 337.6,19.4 256.9,19.4 252.3,24 241.2,24 v241.1,24.1
  Bottom 0.254: U8.18 356.43,19.12 356.2,18.9 351.9,18.9 v350.1,20.7 | v241.1,24.1 240.43,24.77 U6.3
SR_OUT_DAISY_OUT_2  (via drill 0.4 pad 0.6)
  Top 0.254: v234.1,24 208.3,24 203.7,19.4 140.9,19.4 136.3,24 124.7,24 v124.5,24.2
  Bottom 0.254: U6.18 240.43,19.12 240.2,18.9 236.6,18.9 234.7,20.8 234.7,23.4 v234.1,24 | U4.3 124.42,24.27 v124.5,24.2
SR_OUT_DAISY_OUT_3  (via drill 0.4 pad 0.6)
  Top 0.254: v117.8,23.5 116.9,24.4 97,24.4 91.5,18.9 25.4,18.9 20.3,24 10.1,24 v8.6,25.5
  Bottom 0.254: U4.18 124.42,19.32 124,18.9 120.5,18.9 118,21.4 118,23.3 v117.8,23.5 | 8.5,25.6 v8.6,25.5 8.43,25.68 U2.3
SR_OUT_DATA  (via drill 0.4 pad 0.6)
  Top 0.254: v357,26.9 357.3,26.6 384.2,26.6 386.5,28.9 425.5,28.9 426,29.4 426,30.1 426.7,30.8 v428.2,30.8
  Bottom 0.254: U8.3 356.43,27.48 v357,26.9 | CONN1.9 428.5,30.5 v428.2,30.8
SR_OUT_LATCH  (via drill 0.4 pad 0.6)
  Top 0.254: v16.4,18.8 16.8,18.4 129.9,18.4 130.9,19.4 133.1,19.4 v133.8,18.7 134.1,18.4 245.7,18.4 246.7,19.4 250.5,19.4 v250.9,19 251.5,18.4 361.6,18.4 362.8,19.6 366.7,19.6 v367,19.3 367.8,18.5 425.1,18.5 429.5,22.9 v429.5,23.6
  Bottom 0.254: U2.12 16.05,19.16 v16.4,18.8 | v429.5,23.6 CONN1.8 | U8.12 364.05,19.45 364.7,18.8 366.5,18.8 v367,19.3 | U4.12 132.04,19.45 132.8,18.7 v133.8,18.7 | U6.12 248.04,19.45 248.5,19 v250.9,19
SR_OUT_OE  (via drill 0.4 pad 0.6)
  Top 0.254: v16.5,28.4 v132.6,28.4 153.8,28.4 154.2,28.8 248.3,28.8 v248.7,28.4 270.3,28.4 270.8,28.9 364.2,28.9 v364.7,28.4 385.3,28.4 386.6,29.7 v424.3,29.7
  Bottom 0.254: U2.9 16.05,28.86 v16.5,28.4 | U4.9 132.04,28.95 v132.6,28.4 | U8.9 364.05,29.05 v364.7,28.4 | U6.9 248.04,29.05 v248.7,28.4 | CONN1.10 427.3,28.9 427.3,30.5 427,30.8 426.7,30.8 425.6,29.7 v424.3,29.7